# EAGLE board trill-bar (EAGLE 6.5.0)
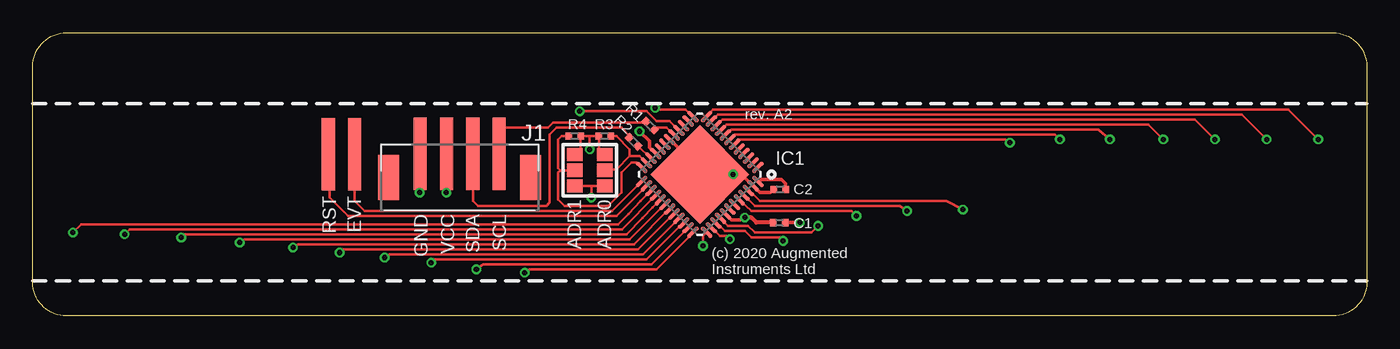
[diagram p0: board, top side]
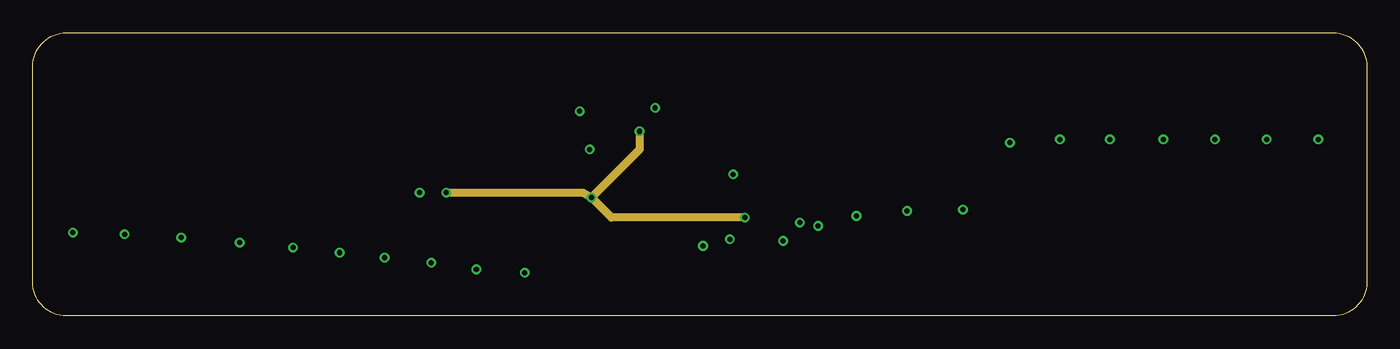
[diagram p1: board, inner layer Route2]
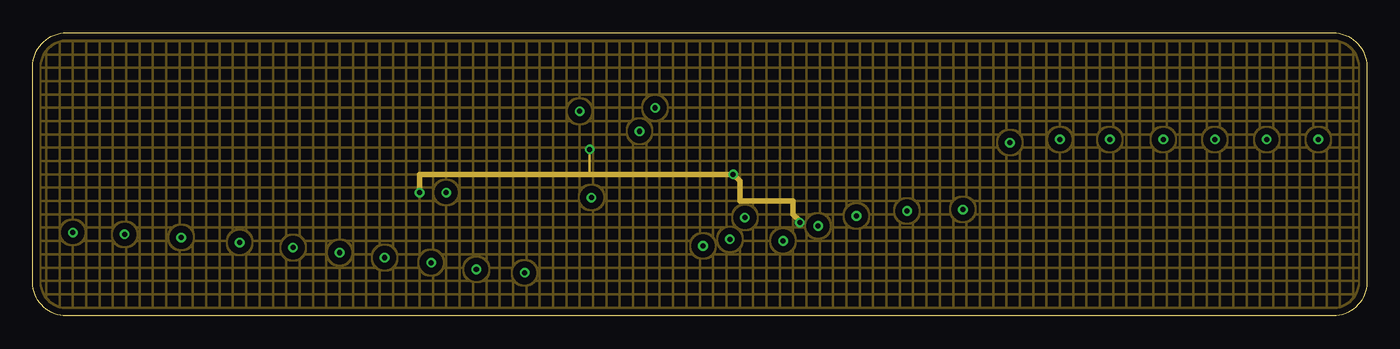
[diagram p2: board, inner layer Route3]
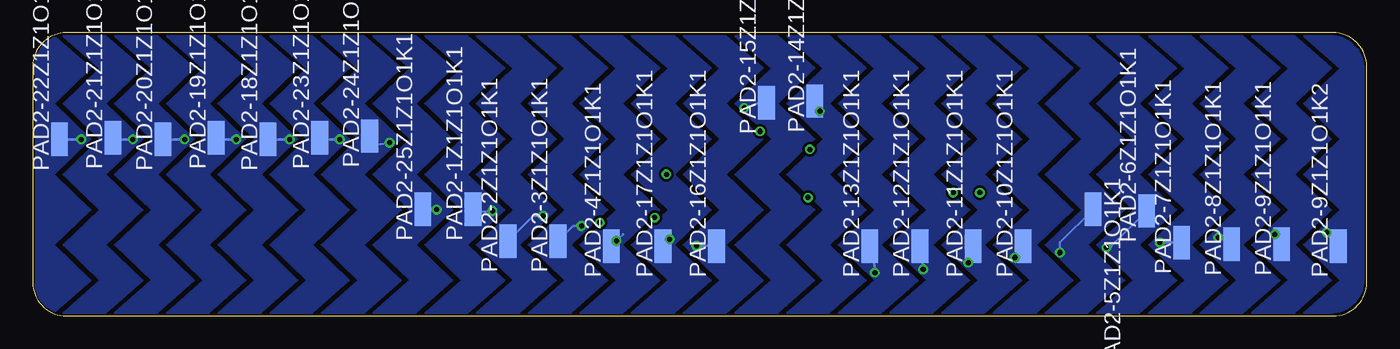
[diagram p3: board, bottom side, seen from below]

Size 101.6 x 21.59 mm. Coordinates in mm from the lower left corner, seen from the top.
Outline: 2.54,21.59 99.06,21.59 arc-90 101.6,19.05 101.6,2.54 arc-90 99.06,0 2.54,0 arc-90 0,2.54 0,19.05 arc-90 2.54,21.59
Copper layers (1*2*3*16): Top 0.035mm / dielectric 0.2mm / Route2 0.035mm / dielectric 1.1mm / Route3 0.035mm / dielectric 0.2mm / Bottom 0.035mm
Design rules "default *": minimum track width 7mil, minimum drill 15mil, track to track 7mil, track to pad 7mil, pad to pad 7mil, via to via 7mil, smd to smd 0mil, copper to edge 5mil, drill to drill 7mil, minimum pad ring 7mil, minimum via ring 7mil, stop-mask expansion 4mil, vias tented up to drill 20mil, thermal gap 10mil

## Footprints (pad centres in the part's own frame; a part is rotated, then mirrored left to right if it is on the bottom)
C0402-SMALL = smd 0.5 x 0.55: P$1 -0.45,0; P$2 0.45,0
QFN48-LEADS = smd 1.1 x 0.3: 1 -3.5,2.75; 2 -3.5,2.25; 3 -3.5,1.75; 4 -3.5,1.25; 5 -3.5,0.75; 6 -3.5,0.25; 7 -3.5,-0.25; 8 -3.5,-0.75; 9 -3.5,-1.25; 10 -3.5,-1.75; 11 -3.5,-2.25; 12 -3.5,-2.75; 25 3.5,-2.75; 26 3.5,-2.25; 27 3.5,-1.75; 28 3.5,-1.25; 29 3.5,-0.75; 30 3.5,-0.25; 31 3.5,0.25; 32 3.5,0.75; 33 3.5,1.25; 34 3.5,1.75; 35 3.5,2.25; 36 3.5,2.75 | smd 0.3 x 1.1: 13 -2.75,-3.5; 14 -2.25,-3.5; 15 -1.75,-3.5; 16 -1.25,-3.5; 17 -0.75,-3.5; 18 -0.25,-3.5; 19 0.25,-3.5; 20 0.75,-3.5; 21 1.25,-3.5; 22 1.75,-3.5; 23 2.25,-3.5; 24 2.75,-3.5; 37 2.75,3.5; 38 2.25,3.5; 39 1.75,3.5; 40 1.25,3.5; 41 0.75,3.5; 42 0.25,3.5; 43 -0.25,3.5; 44 -0.75,3.5; 45 -1.25,3.5; 46 -1.75,3.5; 47 -2.25,3.5; 48 -2.75,3.5 | smd 5.33 x 5.33: EXP 0,0
JST-PH-4-SMT = smd 1 x 5.5: 1 -3,-0.8; 2 -1,-0.8; 3 1,-0.8; 4 3,-0.8 | smd 1.6 x 3.4: NC1 -5.4,1; NC2 5.4,1
SMD1,27-2,54 = smd 1.27 x 2.54: 1 0,0
SOLDER_JUMPER_3PAD = smd 1 x 1.2: P$1 0,0; P$2 1.2,0; P$3 2.4,0
JST-SMT-EXTRAPAD = smd 1 x 5.5: P$1 0,0

## Placement (x,y rotation side)
C1  C0402-SMALL  [C0402-SMALL]  56.86,7.11 180 top
C2  C0402-SMALL  [C0402-SMALL]  56.9,9.65 180 top
IC1  CY8C206X6A  [QFN48-LEADS]  50.8,10.79 225 top
J1  GROVE-SMT  [JST-PH-4-SMT]  32.51,11.56 180 top
PAD2-1Z1Z1O1K1  [SMD1,27-2,54]  68.07,8.13 0 bottom
PAD2-2Z1Z1O1K1  [SMD1,27-2,54]  65.41,5.71 0 bottom
PAD2-3Z1Z1O1K1  [SMD1,27-2,54]  61.59,5.71 0 bottom
PAD2-4Z1Z1O1K1  [SMD1,27-2,54]  57.53,5.33 0 bottom
PAD2-5Z1Z1O1K1  [SMD1,27-2,54]  20.83,8.13 180 bottom
PAD2-6Z1Z1O1K1  [SMD1,27-2,54]  16.76,8 0 bottom
PAD2-7Z1Z1O1K1  [SMD1,27-2,54]  14.1,5.59 0 bottom
PAD2-8Z1Z1O1K1  [SMD1,27-2,54]  10.29,5.46 0 bottom
PAD2-9Z1Z1O1K1  [SMD1,27-2,54]  6.48,5.46 0 bottom
PAD2-9Z1Z1O1K2  [SMD1,27-2,54]  2.16,5.33 0 bottom
PAD2-10Z1Z1O1K1  [SMD1,27-2,54]  26.16,5.33 0 bottom
PAD2-11Z1Z1O1K1  [SMD1,27-2,54]  29.97,5.33 0 bottom
PAD2-12Z1Z1O1K1  [SMD1,27-2,54]  34.04,5.33 0 bottom
PAD2-13Z1Z1O1K1  [SMD1,27-2,54]  37.85,5.33 0 bottom
PAD2-14Z1Z1O1K1  [SMD1,27-2,54]  42.04,16.38 0 bottom
PAD2-15Z1Z1O1K1  [SMD1,27-2,54]  45.72,16.26 0 bottom
PAD2-16Z1Z1O1K1  [SMD1,27-2,54]  49.53,5.33 0 bottom
PAD2-17Z1Z1O1K1  [SMD1,27-2,54]  53.59,5.33 0 bottom
PAD2-18Z1Z1O1K1  [SMD1,27-2,54]  83.69,13.46 0 bottom
PAD2-19Z1Z1O1K1  [SMD1,27-2,54]  87.63,13.59 0 bottom
PAD2-20Z1Z1O1K1  [SMD1,27-2,54]  91.69,13.46 0 bottom
PAD2-21Z1Z1O1K1  [SMD1,27-2,54]  95.5,13.59 0 bottom
PAD2-22Z1Z1O1K1  [SMD1,27-2,54]  99.57,13.46 0 bottom
PAD2-23Z1Z1O1K1  [SMD1,27-2,54]  79.76,13.59 0 bottom
PAD2-24Z1Z1O1K1  [SMD1,27-2,54]  75.95,13.72 0 bottom
PAD2-25Z1Z1O1K1  [SMD1,27-2,54]  71.88,8.13 0 bottom
R1  R0402-SMALL  [C0402-SMALL]  47.02,14.5 135 top
R2  R0402-SMALL  [C0402-SMALL]  45.75,13.28 135 top
R3  R0402-SMALL  [C0402-SMALL]  43.56,13.72 0 top
R4  R0402-SMALL  [C0402-SMALL]  41.27,13.72 180 top
U$7  SOLDER_JUMPER_3PAD  [SOLDER_JUMPER_3PAD]  43.56,9.91 90 top
U$8  SOLDER_JUMPER_3PAD  [SOLDER_JUMPER_3PAD]  41.27,9.91 90 top
U$11  JST-SMT-EXTRAPAD  [JST-SMT-EXTRAPAD]  24.51,12.32 0 top
U$12  JST-SMT-EXTRAPAD  [JST-SMT-EXTRAPAD]  22.51,12.32 0 top

## Library data of the parts
C1 C2 IC1 J1 PAD2-1Z1Z1O1K1 PAD2-2Z1Z1O1K1 PAD2-3Z1Z1O1K1 PAD2-4Z1Z1O1K1 PAD2-5Z1Z1O1K1 PAD2-6Z1Z1O1K1 PAD2-7Z1Z1O1K1 PAD2-8Z1Z1O1K1 PAD2-9Z1Z1O1K1 PAD2-9Z1Z1O1K2 PAD2-10Z1Z1O1K1 PAD2-11Z1Z1O1K1 PAD2-12Z1Z1O1K1 PAD2-13Z1Z1O1K1 PAD2-14Z1Z1O1K1 PAD2-15Z1Z1O1K1 PAD2-16Z1Z1O1K1 PAD2-17Z1Z1O1K1 PAD2-18Z1Z1O1K1 PAD2-19Z1Z1O1K1 PAD2-20Z1Z1O1K1 PAD2-21Z1Z1O1K1 PAD2-22Z1Z1O1K1 PAD2-23Z1Z1O1K1 PAD2-24Z1Z1O1K1 PAD2-25Z1Z1O1K1 R1-R4 U$7 U$8 U$11 U$12 = custom

## Nets
ADDR0: IC1.23 R3.P$2 U$7.P$2
ADDR1: IC1.24 R4.P$2 U$8.P$2
EVENT: IC1.25 U$11.P$1
GND: C1.P$1 C2.P$2 IC1.18 IC1.47 IC1.EXP J1.4 R3.P$1 R4.P$1 U$7.P$3 U$8.P$3
I2C_SCL: J1.1 R1.P$2
I2C_SDA: J1.2 R2.P$2
N$3: C2.P$1 IC1.48
N$71Z1Z1O1K1: IC1.17 R1.P$1
N$72Z1Z1O1K1: IC1.22 R2.P$1
SENS1: IC1.27 PAD2-9Z1Z1O1K2.1
SENS2: IC1.28 PAD2-9Z1Z1O1K1.1
SENS3: IC1.29 PAD2-8Z1Z1O1K1.1
SENS4: IC1.30 PAD2-7Z1Z1O1K1.1
SENS5: IC1.31 PAD2-6Z1Z1O1K1.1
SENS6: IC1.32 PAD2-5Z1Z1O1K1.1
SENS7: IC1.33 PAD2-10Z1Z1O1K1.1
SENS8: IC1.34 PAD2-11Z1Z1O1K1.1
SENS9: IC1.35 PAD2-12Z1Z1O1K1.1
SENS10: IC1.36 PAD2-13Z1Z1O1K1.1
SENS11: IC1.16 PAD2-14Z1Z1O1K1.1
SENS12: IC1.13 PAD2-15Z1Z1O1K1.1
SENS13: IC1.37 PAD2-16Z1Z1O1K1.1
SENS14: IC1.38 PAD2-17Z1Z1O1K1.1
SENS15: IC1.39 PAD2-4Z1Z1O1K1.1
SENS16: IC1.40 PAD2-3Z1Z1O1K1.1
SENS17: IC1.44 PAD2-2Z1Z1O1K1.1
SENS18: IC1.45 PAD2-1Z1Z1O1K1.1
SENS19: IC1.46 PAD2-25Z1Z1O1K1.1
SENS20: IC1.6 PAD2-24Z1Z1O1K1.1
SENS21: IC1.7 PAD2-23Z1Z1O1K1.1
SENS22: IC1.8 PAD2-18Z1Z1O1K1.1
SENS23: IC1.9 PAD2-19Z1Z1O1K1.1
SENS24: IC1.10 PAD2-20Z1Z1O1K1.1
SENS25: IC1.11 PAD2-21Z1Z1O1K1.1
SENS26: IC1.12 PAD2-22Z1Z1O1K1.1
VCC: C1.P$2 IC1.21 IC1.41 J1.3 U$7.P$1 U$8.P$1
XRES: IC1.26 U$12.P$1

## Tracks (layer width: path | path; a pad name or v marks a point on that pad's centre or on a via)
ADDR0
  Top 0.178: IC1.23 46.23,12.19 45.47,12.19 | 45.47,12.19 44.45,11.18 43.63,11.18 U$7.P$2 | R3.P$2 44.45,13.72 45.47,12.7 45.47,12.19
ADDR1
  Top 0.178: R4.P$2 40.26,13.72 40.01,13.46 40.01,11.29 40.19,11.1 | 40.19,11.1 U$8.P$2 | IC1.24 46.33,11.32 45.97,11.68 45.59,11.68 44.83,10.92 44.83,9.4 43.81,8.38 40.51,8.38 40.01,8.89 40.01,10.92 40.19,11.1
EVENT
  Top 0.178: IC1.25 44.11,8 25.27,8 24.51,8.76 U$11.P$1
GND  (via drill 0.38)
  Top 0.178: v53.34,10.79 49.15,10.79 49.97,11.62 | U$7.P$3 43.11,12.76 R3.P$1 42.42,13.72 | U$8.P$3 41.73,12.76 R4.P$1 42.42,13.72 | v42.42,12.7 42.42,13.72
  Top 0.203: IC1.47
  Top 0.254: IC1.18 48.53,13.45 49.78,12.19 49.78,11.81 49.97,11.62 IC1.EXP 53.98,10.79 IC1.47 | C2.P$2 56.19,9.4 55.37,9.4 IC1.47 | C1.P$1 v58.42,7.11
  Top 0.406: J1.4 29.51,9.45 v29.46,9.4
  Route3 0.178: v42.42,12.7 42.42,10.79
  Route3 0.406: v29.46,9.4 29.46,10.79 42.42,10.79 v53.34,10.79 53.85,10.29 53.85,8.76 57.91,8.76 57.91,7.75 58.42,7.24 v58.42,7.11
  pour Route3 (isolate 0.508, hatched): 101.47,3.3 101.47,18.54 arc90 98.42,21.34 3.3,21.34 arc90 0.25,18.42 0.25,3.18 arc90 3.31,0.25 98.43,0.25 arc90
I2C_SCL
  Top 0.178: R1.P$2 46.51,14.76 46.48,14.73 39.62,14.73 39.24,14.35 35.69,14.35 35.56,14.22 35.56,12.28 J1.1
I2C_SDA
  Top 0.178: R2.P$2 45.49,13.69 44.83,14.35 39.88,14.35 39.37,13.84 39.37,8.64 39.12,8.38 33.91,8.38 33.53,8.76 33.53,12.21 J1.2
N$3
  Top 0.254: IC1.48 55.35,10.27 55.5,10.41 57.02,10.41 57.35,10.09 C2.P$1
N$71Z1Z1O1K1
  Top 0.178: IC1.17 48.84,13.8 48.27,14.38 47.56,14.38 R1.P$1
N$72Z1Z1O1K1
  Top 0.178: IC1.22 47.09,12.06 R2.P$1
SENS1  (via drill 0.38)
  Top 0.178: 47.07,9.56 46.27,8.76 45.38,7.79 44.58,6.98 3.68,6.98 v3.05,6.35
  Top 0.203: IC1.27 47.07,9.56
  Bottom 0.203: v3.05,6.35 3.05,6.22 PAD2-9Z1Z1O1K2.1
  pour Bottom: 4.76,21.34 2.79,21.34 arc90 0.25,18.8 0.25,2.79 arc90 2.79,0.25 4.76,0.25 1.97,2.7 4.76,5.4 1.97,8.1 4.76,10.79 1.97,13.49 4.76,16.19 1.97,18.89
SENS2  (via drill 0.38)
  Top 0.178: IC1.28 44.89,6.6 7.37,6.6 v6.99,6.22
  Top 0.203: IC1.28
  Bottom 0.203: v6.99,6.22 6.99,5.97 PAD2-9Z1Z1O1K1.1
  pour Bottom: 8.7,21.34 5.52,21.34 2.73,18.89 5.52,16.19 2.73,13.49 5.52,10.79 2.73,8.1 5.52,5.4 2.73,2.7 5.52,0.25 8.7,0.25 5.91,2.7 8.7,5.4 5.91,8.1 8.7,10.79 5.91,13.49 8.7,16.19 5.91,18.89
SENS3  (via drill 0.38)
  Top 0.178: 47.21,8.28 46.45,7.46 45.21,6.22 11.56,6.22 v11.3,5.97
  Top 0.203: IC1.29 47.21,8.28
  Bottom 0.203: v11.3,5.97 10.79,5.97 PAD2-8Z1Z1O1K1.1
  pour Bottom: 12.64,21.34 9.46,21.34 6.67,18.89 9.46,16.19 6.67,13.49 9.46,10.79 6.67,8.1 9.46,5.4 6.67,2.7 9.46,0.25 12.64,0.25 9.84,2.7 12.64,5.4 9.84,8.1 12.64,10.79 9.84,13.49 12.64,16.19 9.84,18.89
SENS4  (via drill 0.38)
  Top 0.178: 48.12,8.5 45.47,5.84 16.13,5.84 v15.76,5.59
  Top 0.203: IC1.30 48.12,8.5
  Bottom 0.203: v15.76,5.59 PAD2-7Z1Z1O1K1.1
  pour Bottom: 16.57,21.34 13.4,21.34 10.6,18.89 13.4,16.19 10.6,13.49 13.4,10.79 10.6,8.1 13.4,5.4 10.6,2.7 13.4,0.25 16.57,0.25 13.78,2.7 16.57,5.4 13.78,8.1 16.57,10.79 13.78,13.49 16.57,16.19 13.78,18.89
SENS5  (via drill 0.38)
  Top 0.178: 48.46,8.14 45.78,5.46 20.2,5.46 v19.81,5.21
  Top 0.203: IC1.31 48.46,8.14
  Bottom 0.203: v19.81,5.21 19.43,5.33 PAD2-6Z1Z1O1K1.1
  pour Bottom: 20.51,21.34 17.34,21.34 14.54,18.89 17.34,16.19 14.54,13.49 17.34,10.79 14.54,8.1 17.34,5.4 14.54,2.7 17.34,0.25 20.51,0.25 17.72,2.7 20.51,5.4 17.72,8.1 20.51,10.79 17.72,13.49 20.51,16.19 17.72,18.89
SENS6  (via drill 0.38)
  Top 0.178: 48.81,7.79 46.1,5.08 23.62,5.08 v23.37,4.83
  Top 0.203: IC1.32 48.81,7.79
  Bottom 0.203: v23.37,4.83 23.37,5.59 PAD2-5Z1Z1O1K1.1
  pour Bottom: 24.45,21.34 21.27,21.34 18.48,18.89 21.27,16.19 18.48,13.49 21.27,10.79 18.48,8.1 21.27,5.4 18.48,2.7 21.27,0.25 24.45,0.25 21.65,2.7 24.45,5.4 21.65,8.1 24.45,10.79 21.65,13.49 24.45,16.19 21.65,18.89
SENS7  (via drill 0.38)
  Top 0.178: 49.21,7.43 46.48,4.7 27.18,4.7 v26.8,4.44
  Top 0.203: IC1.33 49.21,7.43
  Bottom 0.203: v26.8,4.44 26.92,4.57 PAD2-10Z1Z1O1K1.1
  pour Bottom: 28.38,21.34 25.21,21.34 22.42,18.89 25.21,16.19 22.42,13.49 25.21,10.79 22.42,8.1 25.21,5.4 22.42,2.7 25.21,0.25 28.38,0.25 25.59,2.7 28.38,5.4 25.59,8.1 28.38,10.79 25.59,13.49 28.38,16.19 25.59,18.89
SENS8  (via drill 0.38)
  Top 0.178: 49.52,7.08 46.74,4.3 30.59,4.3 v30.35,4.06
  Top 0.203: IC1.34 49.52,7.08
  Bottom 0.203: v30.35,4.06 30.35,4.95 PAD2-11Z1Z1O1K1.1
  pour Bottom: 32.32,21.34 29.15,21.34 26.35,18.89 29.15,16.19 26.35,13.49 29.15,10.79 26.35,8.1 29.15,5.4 26.35,2.7 29.15,0.25 32.32,0.25 29.53,2.7 32.32,5.4 29.53,8.1 32.32,10.79 29.53,13.49 32.32,16.19 29.53,18.89
SENS9  (via drill 0.38)
  Top 0.178: 49.91,6.73 47.12,3.94 34.29,3.94 v33.78,3.56
  Top 0.203: IC1.35 49.91,6.73
  Bottom 0.203: v33.78,3.56 PAD2-12Z1Z1O1K1.1
  pour Bottom: 36.26,21.34 33.08,21.34 30.29,18.89 33.08,16.19 30.29,13.49 33.08,10.79 30.29,8.1 33.08,5.4 30.29,2.7 33.08,0.25 36.26,0.25 33.46,2.7 36.26,5.4 33.46,8.1 36.26,10.79 33.46,13.49 36.26,16.19 33.46,18.89
SENS10  (via drill 0.38)
  Top 0.178: 50.27,6.33 47.5,3.56 37.85,3.56 v37.47,3.3
  Top 0.203: IC1.36 50.27,6.33
  Bottom 0.203: v37.47,3.3 37.59,5.08 PAD2-13Z1Z1O1K1.1
  pour Bottom: 40.2,21.34 37.02,21.34 34.23,18.89 37.02,16.19 34.23,13.49 37.02,10.79 34.23,8.1 37.02,5.4 34.23,2.7 37.02,0.25 40.2,0.25 37.4,2.7 40.2,5.4 37.4,8.1 40.2,10.79 37.4,13.49 40.2,16.19 37.4,18.89
SENS11  (via drill 0.38)
  Top 0.178: 49.21,14.16 48.51,14.86 47.49,14.86 46.73,15.62 42.04,15.62 v41.66,15.6
  Top 0.203: IC1.16 49.21,14.16
  Bottom 0.203: v41.66,15.6 42.16,16.26 PAD2-14Z1Z1O1K1.1
  pour Bottom: 44.13,21.34 40.96,21.34 38.16,18.89 40.96,16.19 38.16,13.49 40.96,10.79 38.16,8.1 40.96,5.4 38.16,2.7 40.96,0.25 44.13,0.25 41.34,2.7 44.13,5.4 41.34,8.1 44.13,10.79 41.34,13.49 44.13,16.19 41.34,18.89
SENS12  (via drill 0.38)
  Top 0.178: 50.24,15.21 49.73,15.73 47.62,15.73 v47.4,15.87
  Top 0.203: IC1.13 50.24,15.21
  Bottom 0.203: v47.4,15.87 45.85,16.38 PAD2-15Z1Z1O1K1.1
  pour Bottom: 48.07,21.34 44.89,21.34 42.1,18.89 44.89,16.19 42.1,13.49 44.89,10.79 42.1,8.1 44.89,5.4 42.1,2.7 44.89,0.25 48.07,0.25 45.28,2.7 48.07,5.4 45.28,8.1 48.07,10.79 45.28,13.49 48.07,16.19 45.28,18.89
SENS13  (via drill 0.38)
  Top 0.178: v51.05,5.33 51.05,6.1 IC1.37
  Bottom 0.178: v51.05,5.33 PAD2-16Z1Z1O1K1.1
  pour Bottom: 52.01,21.34 48.83,21.34 46.04,18.89 48.83,16.19 46.04,13.49 48.83,10.79 46.04,8.1 48.83,5.4 46.04,2.7 48.83,0.25 52.01,0.25 49.21,2.7 52.01,5.4 49.21,8.1 52.01,10.79 49.21,13.49 52.01,16.19 49.21,18.89
SENS14  (via drill 0.38)
  Top 0.178: 51.69,6.73 52.32,6.1 52.83,6.1 v53.09,5.84
  Top 0.203: IC1.38 51.69,6.73
  Bottom 0.203: v53.09,5.84 PAD2-17Z1Z1O1K1.1
  pour Bottom: 55.94,21.34 52.77,21.34 49.97,18.89 52.77,16.19 49.97,13.49 52.77,10.79 49.97,8.1 52.77,5.4 49.97,2.7 52.77,0.25 55.94,0.25 53.15,2.7 55.94,5.4 53.15,8.1 55.94,10.79 53.15,13.49 55.94,16.19 53.15,18.89
SENS15  (via drill 0.38)
  Top 0.178: 52.1,7.08 52.7,6.48 54.23,6.48 54.74,5.97 56.9,5.97 v57.15,5.71
  Top 0.203: IC1.39 52.1,7.08
  Bottom 0.203: 56.64,6.22 v57.15,5.71 PAD2-4Z1Z1O1K1.1
  pour Bottom: 59.88,21.34 56.71,21.34 53.91,18.89 56.71,16.19 53.91,13.49 56.71,10.79 53.91,8.1 56.71,5.4 53.91,2.7 56.71,0.25 59.88,0.25 57.09,2.7 59.88,5.4 57.09,8.1 59.88,10.79 57.09,13.49 59.88,16.19 57.09,18.89
SENS16  (via drill 0.38)
  Top 0.178: 52.39,7.43 52.96,6.86 54.48,6.86 54.99,6.35 59.31,6.35 v59.82,6.86
  Top 0.203: IC1.40 52.39,7.43
  Bottom 0.203: v59.82,6.86 60.45,6.86 PAD2-3Z1Z1O1K1.1
  pour Bottom: 63.82,21.34 60.64,21.34 57.85,18.89 60.64,16.19 57.85,13.49 60.64,10.79 57.85,8.1 60.64,5.4 57.85,2.7 60.64,0.25 63.82,0.25 61.02,2.7 63.82,5.4 61.02,8.1 63.82,10.79 61.02,13.49 63.82,16.19 61.02,18.89
SENS17  (via drill 0.38)
  Top 0.178: 53.78,8.87 54.74,8 62.36,8 v62.74,7.62
  Top 0.203: IC1.44 53.78,8.87
  Bottom 0.203: v62.74,7.62 63.5,7.62 PAD2-2Z1Z1O1K1.1
  pour Bottom: 67.75,21.34 64.58,21.34 61.79,18.89 64.58,16.19 61.79,13.49 64.58,10.79 61.79,8.1 64.58,5.4 61.79,2.7 64.58,0.25 67.75,0.25 64.96,2.7 67.75,5.4 64.96,8.1 67.75,10.79 64.96,13.49 67.75,16.19 64.96,18.89
SENS18  (via drill 0.38)
  Top 0.178: IC1.45 54.99,8.38 66.04,8.38 v66.6,8
  Top 0.203: IC1.45
  Bottom 0.203: v66.6,8 67.82,7.87 PAD2-1Z1Z1O1K1.1
  pour Bottom: 71.69,21.34 68.52,21.34 65.72,18.89 68.52,16.19 65.72,13.49 68.52,10.79 65.72,8.1 68.52,5.4 65.72,2.7 68.52,0.25 71.69,0.25 68.9,2.7 71.69,5.4 68.9,8.1 71.69,10.79 68.9,13.49 71.69,16.19 68.9,18.89
SENS19  (via drill 0.38)
  Top 0.178: 54.58,9.56 55.37,8.76 69.6,8.76 v70.84,8.1
  Top 0.203: IC1.46 54.58,9.56
  Bottom 0.203: v70.84,8.1 PAD2-25Z1Z1O1K1.1
  pour Bottom: 75.63,21.34 72.45,21.34 69.66,18.89 72.45,16.19 69.66,13.49 72.45,10.79 69.66,8.1 72.45,5.4 69.66,2.7 72.45,0.25 75.63,0.25 72.83,2.7 75.63,5.4 72.83,8.1 75.63,10.79 72.83,13.49 75.63,16.19 72.83,18.89
SENS20  (via drill 0.38)
  Top 0.178: 53.48,13.09 53.85,13.46 74.04,13.46 v74.42,13.21
  Top 0.203: IC1.6 53.48,13.09
  Bottom 0.203: v74.42,13.21 75.31,13.08 PAD2-24Z1Z1O1K1.1
  pour Bottom: 79.57,21.34 76.39,21.34 73.6,18.89 76.39,16.19 73.6,13.49 76.39,10.79 73.6,8.1 76.39,5.4 73.6,2.7 76.39,0.25 79.57,0.25 76.77,2.7 79.57,5.4 76.77,8.1 79.57,10.79 76.77,13.49 79.57,16.19 76.77,18.89
SENS21  (via drill 0.38)
  Top 0.178: 53.1,13.47 53.47,13.84 77.85,13.84 v78.23,13.46
  Top 0.203: IC1.7 53.1,13.47
  Bottom 0.203: v78.23,13.46 79.63,13.46 PAD2-23Z1Z1O1K1.1
  pour Bottom: 83.5,21.34 80.33,21.34 77.53,18.89 80.33,16.19 77.53,13.49 80.33,10.79 77.53,8.1 80.33,5.4 77.53,2.7 80.33,0.25 83.5,0.25 80.71,2.7 83.5,5.4 80.71,8.1 83.5,10.79 80.71,13.49 83.5,16.19 80.71,18.89
SENS22  (via drill 0.38)
  Top 0.178: 52.79,13.8 53.21,14.22 81.15,14.22 v82.04,13.46
  Top 0.203: IC1.8 52.79,13.8
  Bottom 0.203: v82.04,13.46 PAD2-18Z1Z1O1K1.1
  pour Bottom: 87.44,21.34 84.26,21.34 81.47,18.89 84.26,16.19 81.47,13.49 84.26,10.79 81.47,8.1 84.26,5.4 81.47,2.7 84.26,0.25 87.44,0.25 84.65,2.7 87.44,5.4 84.65,8.1 87.44,10.79 84.65,13.49 87.44,16.19 84.65,18.89
SENS23  (via drill 0.38)
  Top 0.178: 52.39,14.16 52.83,14.61 84.96,14.61 v86.11,13.46
  Top 0.203: IC1.9 52.39,14.16
  Bottom 0.203: v86.11,13.46 87.5,13.46 PAD2-19Z1Z1O1K1.1
  pour Bottom: 91.38,21.34 88.2,21.34 85.41,18.89 88.2,16.19 85.41,13.49 88.2,10.79 85.41,8.1 88.2,5.4 85.41,2.7 88.2,0.25 91.38,0.25 88.58,2.7 91.38,5.4 88.58,8.1 91.38,10.79 88.58,13.49 91.38,16.19 88.58,18.89
SENS24  (via drill 0.38)
  Top 0.178: 52.1,14.51 52.52,14.99 88.52,14.99 v90.04,13.46
  Top 0.203: IC1.10 52.1,14.51
  Bottom 0.203: v90.04,13.46 PAD2-20Z1Z1O1K1.1
  pour Bottom: 95.31,21.34 92.14,21.34 89.34,18.89 92.14,16.19 89.34,13.49 92.14,10.79 89.34,8.1 92.14,5.4 89.34,2.7 92.14,0.25 95.31,0.25 92.52,2.7 95.31,5.4 92.52,8.1 95.31,10.79 92.52,13.49 95.31,16.19 92.52,18.89
SENS25  (via drill 0.38)
  Top 0.178: 51.69,14.86 52.2,15.37 92.08,15.37 v93.98,13.46
  Top 0.203: IC1.11 51.69,14.86
  Bottom 0.203: v93.98,13.46 95.38,13.46 PAD2-21Z1Z1O1K1.1
  pour Bottom: 99.25,21.34 96.08,21.34 93.28,18.89 96.08,16.19 93.28,13.49 96.08,10.79 93.28,8.1 96.08,5.4 93.28,2.7 96.08,0.25 99.25,0.25 96.46,2.7 99.25,5.4 96.46,8.1 99.25,10.79 96.46,13.49 99.25,16.19 96.46,18.89
SENS26  (via drill 0.38)
  Top 0.178: IC1.12 51.82,15.75 95.63,15.75 v97.92,13.46
  Top 0.203: IC1.12
  Bottom 0.203: v97.92,13.46 PAD2-22Z1Z1O1K1.1
  pour Bottom: 101.35,2.6 101.35,18.99 arc90 99.89,21.21 97.22,18.89 100.01,16.19 97.22,13.49 100.01,10.79 97.22,8.1 100.01,5.4 97.22,2.7 99.89,0.38 arc90
VCC  (via drill 0.38)
  Top 0.178: U$8.P$1 42.55,9.91 | 42.55,9.91 v42.55,9.02 | U$7.P$1 42.55,9.91
  Top 0.203: IC1.41 52.76,7.77
  Top 0.254: IC1.21 46.99,12.83 46.99,13.33 v46.21,14.08 | 52.76,7.77 53.23,7.31 53.91,7.31 v54.23,7.49
  Top 0.305: C1.P$2 55.12,7.11 54.74,7.49 v54.23,7.49
  Top 0.406: J1.3 31.51,9.41 v31.5,9.4
  Route2 0.61: v31.5,9.4 41.91,9.4 v42.55,9.02 | v54.23,7.49 44.07,7.49 v42.55,9.02 | v46.21,14.08 46.23,12.7 v42.55,9.02
XRES
  Top 0.178: IC1.26 44.44,7.62 24,7.62 22.61,9.02 22.61,12.22 U$12.P$1

## Text on the board
tPlace: RST | EVT | ADR1 | ADR0 | GND | VCC | SDA | SCL | (c) 2020 Augmented / Instruments Ltd
tNames: R4 | R3 | rev. A2 | C2